# Altium PCB TIDA-010967_PCB.PcbDoc (part 3 of 5)
Units mil, origin at the board's own origin, x right, y up, seen from the top; angles counter-clockwise.
Board outline 2322.7 x 960 mil, 2 copper layers (Top Layer, Bottom Layer), stack 44.731 mil thick; 178 components, 80 nets, 496 pads, 399 vias.
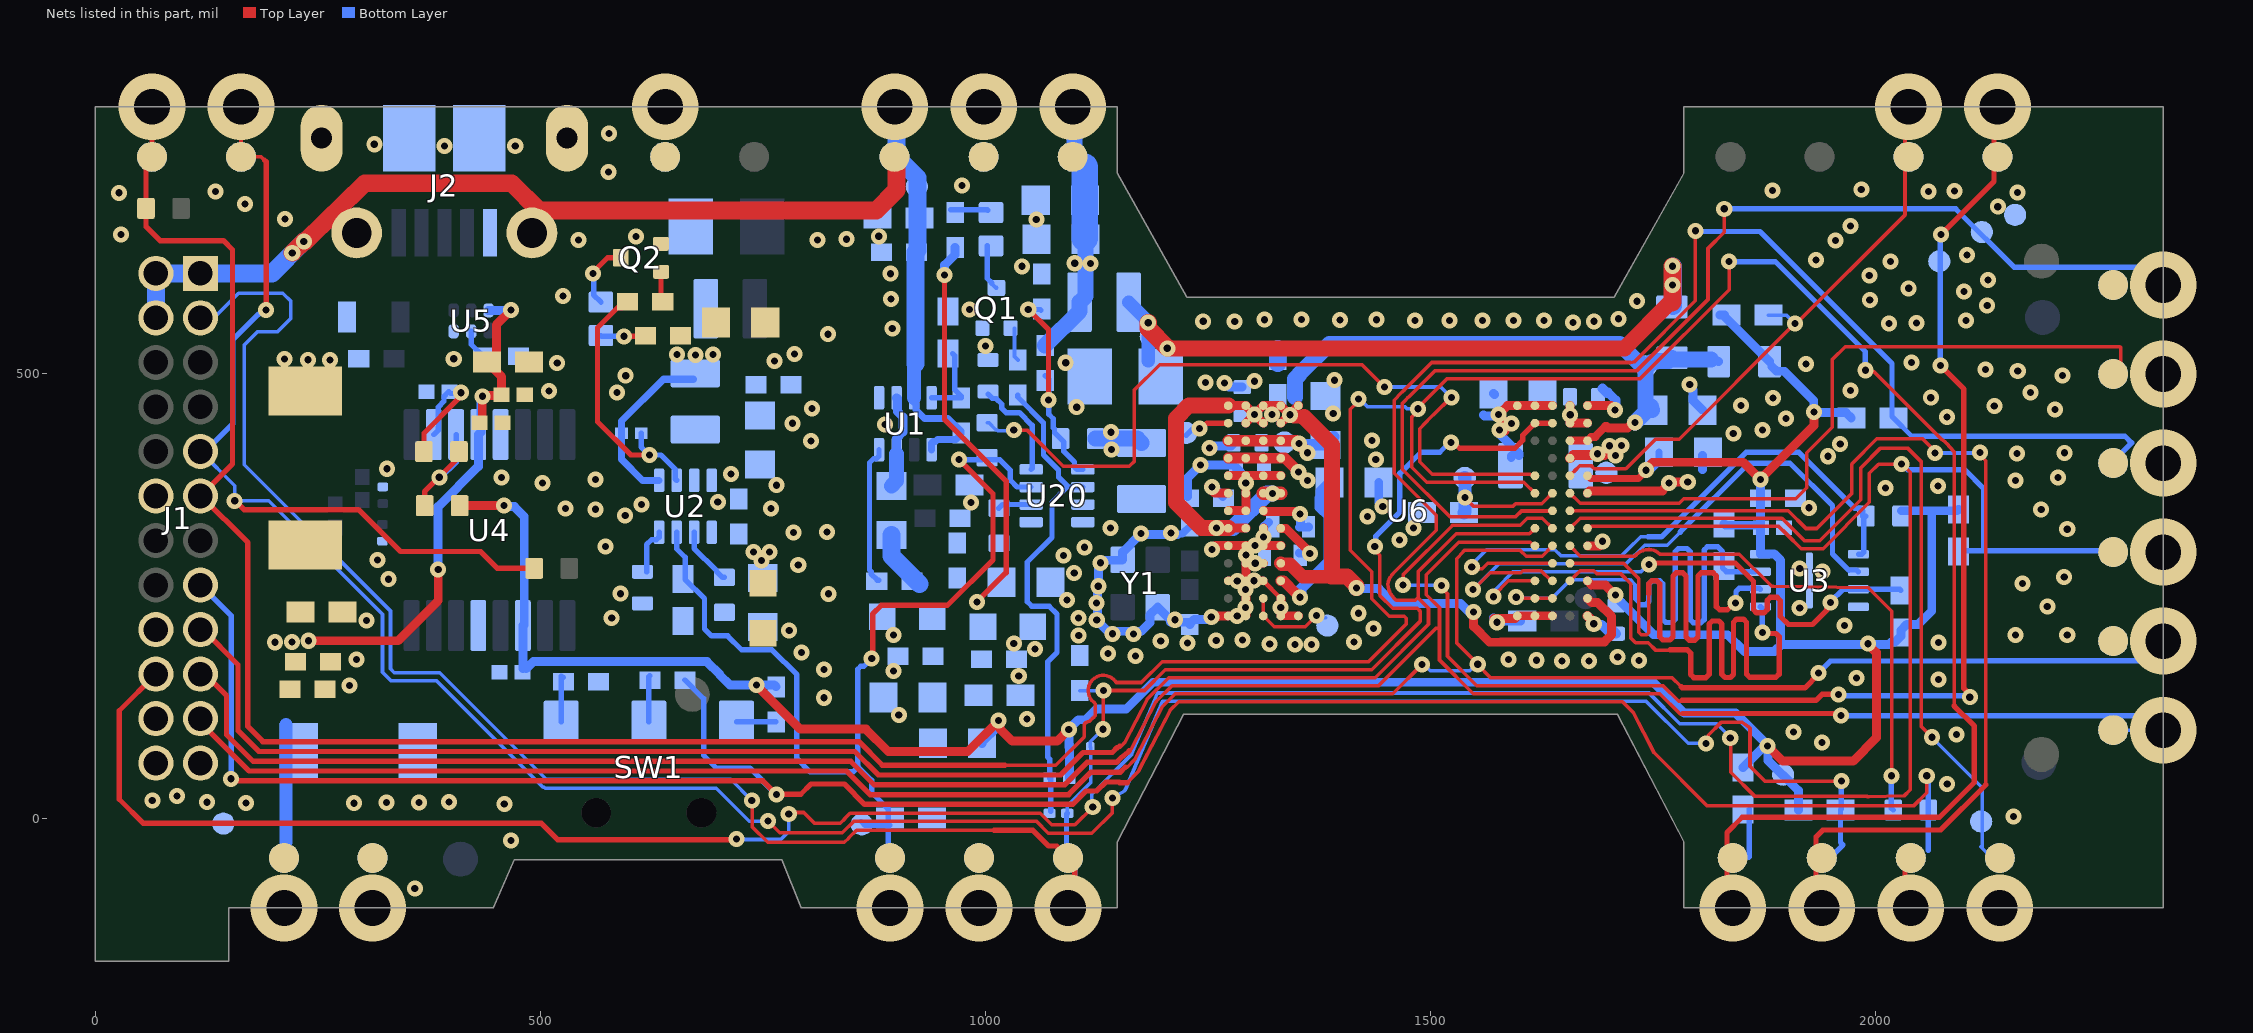
[diagram p2: the nets of this part, all layers, seen from the top]

## Part data (continued)
R14 R15: library part CMP-0027082-3, "RES, 27, 5%, 0.05 W, 0201", Manufacturer="Yageo America", Power_W=50mW, Supplier Part Number 1=YAG2291CT-ND, TempCo="200 ppm/C", Tolerance_%=5%, Value2=0.05W, Value_Code=27R0, ValueDisplayed=27, AEC Category=Q200, AEC Grade=N/A, AEC Qualified=N, ComponentLink1Description="Datasheet link", ComponentLink1URL=http://www.yageo.com/documents/recent/PYu-RC_Group_51_RoHS_L_5.pdf, CompType=Resistor, EIA_Code=E24, LatestRevisionDate=2017-03-09, MountType=SMT, PackageReference=0201, PartNumber=RC0201JR-0727RL, Published=2016-10-14, Publisher="Texas Instruments", Res_ohm=27, RoHS=Y, SizeArea_mm2=0.18, SizeX_mm=0.6, SizeY_mm=0.3, SizeZ_mm=0.26, Supplier 1=Digi-Key, Supplier 2=Mouser, Supplier Part Number 2=603-RC0201JR-0727RL, Technology="Thick Film", U/M=EA, Value1=5%, VDC_V=25V
R19: library part CMP-0026557-2, "RES, 7.87 k, 1%, 0.063 W, AEC-Q200 Grade 0, 0402", Manufacturer=Vishay-Dale, Power_W=63mW, Supplier Part Number 1=541-7.87KLCT-ND, TempCo="100 ppm/C", Tolerance_%=1%, Value2=0.063W, Value_Code=7k87, ValueDisplayed=7.87k, AEC Category=Q200, AEC Grade=0, AEC Qualified=Y, ComponentLink1Description="Datasheet link", ComponentLink1URL=http://www.vishay.com/docs/20035/dcrcwe3.pdf, CompType=Resistor, EIA_Code=E96, MountType=SMT, PackageReference=0402, PartNumber=CRCW04027K87FKED, Res_ohm=7.87k, RoHS=E, SizeArea_mm2=0.5, SizeX_mm=1, SizeY_mm=0.5, SizeZ_mm=0.6, Supplier 1=Digi-Key, Supplier 2=Newark, Supplier 3=Mouser, Supplier Part Number 2=52K7249, Supplier Part Number 3=71-CRCW0402-7.87K-E3, Technology="Thick Film", Value1=1%, VDC_V=50V
R21: library part CMP-0026574-2, "RES, 82.5 k, 1%, 0.063 W, AEC-Q200 Grade 0, 0402", Manufacturer=Vishay-Dale, Power_W=63mW, Supplier Part Number 1=541-82.5KLCT-ND, TempCo="100 ppm/C", Tolerance_%=1%, Value2=0.063W, Value_Code=82k5, ValueDisplayed=82.5k, AEC Category=Q200, AEC Grade=0, AEC Qualified=Y, ComponentLink1Description="Datasheet link", ComponentLink1URL=http://www.vishay.com/docs/20035/dcrcwe3.pdf, CompType=Resistor, EIA_Code=E96, MountType=SMT, PackageReference=0402, PartNumber=CRCW040282K5FKED, Res_ohm=82.5k, RoHS=E, SizeArea_mm2=0.5, SizeX_mm=1, SizeY_mm=0.5, SizeZ_mm=0.6, Supplier 1=Digi-Key, Supplier 2=Newark, Supplier 3=Mouser, Supplier Part Number 2=52K7304, Supplier Part Number 3=71-CRCW0402-82.5K-E3, Technology="Thick Film", Value1=1%, VDC_V=50V
R22: library part CMP-0120016-1, "33.2 Ohms ¡À1% 0.063W, 1/16W Chip Resistor 0402 (1005 Metric) Thin Film", Digikey Part Number=13-RT0402FRE0733R2LCT-ND, Manufacturer=Yageo, Mouser Part Number=603-RT0402FRE0733R2L, Operating Temperature Range="-55¡ãC to +155¡ãC", Power_W=63mW, TempCo=50ppm/¡ãC, Tolerance_%=1%, AEC Qualified=No, ComponentLink1Description=Datasheet, ComponentLink1URL=https://www.yageo.com/upload/media/product/productsearch/datasheet/rchip/PYu-RT_1-to-0.01_RoHS_L_15.pdf, datasheet=https://www.yageo.com/upload/media/product/productsearch/datasheet/rchip/PYu-RT_1-to-0.01_RoHS_L_15.pdf, Datasheet Path=datasheets/Res-RT0402FRE0733R2L.pdf, Digikey Description="RES SMD 33.2 OHM 1% 1/16W 0402", helpURL=https://upverter.com/upn/revision/fe73ddde98d0207b/, Lead Free=Yes, PackageReference=0402, Part Number=RT0402FRE0733R2L, PartNumber=RT0402FRE0733R2L, Res_ohm=33.2, RoHS=TRUE, Series=RT, SizeZ_mm=0.35mm, Supplier 1=Digikey, Supplier 2=Mouser, Supplier Part Number 1=13-RT0402FRE0733R2LCT-ND, Supplier Part Number 2=603-RT0402FRE0733R2L, Technology="Thin Film", VDC_V=50V
R23 R175: library part CMP-0027261-3, "RES, 100 k, 1%, 0.05 W, 0201", Manufacturer=Vishay-Dale, Power_W=50mW, Supplier Part Number 1=541-100KAABCT-ND, TempCo="100 ppm/C", Tolerance_%=1%, Value2=0.05W, Value_Code=100k, AEC Category=Q200, AEC Grade=N/A, AEC Qualified=N, ComponentLink1Description="Datasheet link", ComponentLink1URL=http://www.vishay.com/docs/20052/crcw0201e3.pdf, CompType=Resistor, EIA_Code=E96, MountType=SMT, PackageReference=0201, PartNumber=CRCW0201100KFKED, Res_ohm=100k, RoHS=E, SizeArea_mm2=0.18, SizeX_mm=0.6, SizeY_mm=0.3, SizeZ_mm=0.26, Supplier 1=Digi-Key, Supplier 2=Newark, Supplier 3=Mouser, Supplier Part Number 2=84R1457, Supplier Part Number 3=71-CRCW0201100KFKED, Technology="Thick Film", Value1=1%, ValueDisplayed=100k, VDC_V=30V
R26 R244: library part CMP-0026727-1, "RES, 1.00 M, 1%, 0.063 W, 0402", Manufacturer="Yageo America", Power_W=63mW, Supplier Part Number 1=311-1.00MLRCT-ND, TempCo="100 ppm/C", Tolerance_%=1%, Value2=0.063W, Value_Code=1M00, ValueDisplayed=1.00M, AEC Category=Q200, AEC Qualified=?, ComponentLink1Description="Datasheet link", ComponentLink1URL=http://www.yageo.com/NewPortal/yageodocoutput?fileName=/pdf/R-Chip/PYu-RC_Group_51_RoHS_L_0.pdf, CompType=Resistor, EIA_Code=E96, LatestRevisionDate=2017-03-09, MountType=SMT, PackageReference=0402, PartNumber=RC0402FR-071ML, Published=2008-06-26, Publisher="Texas Instruments", Res_ohm=1M, RoHS=Y, SizeArea_mm2=0.5, SizeX_mm=1, SizeY_mm=0.5, SizeZ_mm=0.6, Supplier 1=Digi-Key, Supplier 2=Newark, Supplier 3=Mouser, Supplier Part Number 2=66R1086, Supplier Part Number 3=603-RC0402FR-071ML, Technology="Thick Film", U/M=EA, Value1=1%
R27 R180: library part CMP-0094741-1, "Res Thick Film 0402 18K Ohm 1% 1/16W ¡À100ppm/¡ãC Molded SMD Paper T/R", Digikey Part Number=541-4757-1-ND, Manufacturer=Vishay, Mouser Part Number=71-CRCW040218K0FKEDC, Operating Temperature Range="-55¡ãC to +155¡ãC", Power_W=63mW, TempCo=100ppm/¡ãC, Tolerance_%=1%, AEC Qualified=No, ComponentLink1Description=Datasheet, ComponentLink1URL=https://www.vishay.com/docs/28773/crcwce3.pdf, datasheet=https://www.vishay.com/docs/28773/crcwce3.pdf, Datasheet Path=datasheets/Res-CRCW040218K0FKEDC.pdf, Digikey Description="RES 18K OHM 1% 1/16W 0402", helpURL=https://upverter.com/upn/revision/f5433614e467177c/, Lead Free=Yes, Mouser Description="Res Thick Film 0402 18K Ohm 1% 1/16W ¡À100ppm/¡ãC Molded SMD Paper T/R", PackageReference=0402, Part Number=CRCW040218K0FKEDC, PartNumber=CRCW040218K0FKEDC, Res_ohm=18k, RoHS=TRUE, Series="CRCW-C e3", SizeZ_mm=0.35mm, Supplier 1=Digikey, Supplier 2=Mouser, Supplier Part Number 1=541-4757-1-ND, Supplier Part Number 2=71-CRCW040218K0FKEDC, Technology="Thick Film", VDC_V=50V
R28 R29 R172 R179: library part CMP-0026704-1, "RES, 510, 1%, 0.1 W, 0402", Manufacturer=Panasonic, Power_W=100mW, Supplier Part Number 1=P510LCT-ND, TempCo="100 ppm/C", Tolerance_%=1%, Value2=0.1W, Value_Code=510R, ValueDisplayed=510, AEC Category=Q200, AEC Qualified=?, ComponentLink1Description="Datasheet link", ComponentLink1URL=http://industrial.panasonic.com/www-data/pdf/AOA0000/AOA0000CE2.pdf, CompType=Resistor, LatestRevisionDate=2017-03-09, MountType=SMT, PackageReference=0402, PartNumber=ERJ-2RKF5100X, Published=2008-06-26, Publisher="Texas Instruments", Res_ohm=510, RoHS=Y, SizeArea_mm2=0.5, SizeX_mm=1, SizeY_mm=0.5, SizeZ_mm=0.6, Supplier 1=Digi-Key, Supplier 2=Newark, Supplier 3=Mouser, Supplier Part Number 2=53W4394, Supplier Part Number 3=667-ERJ-2RKF5100X, Technology="Thick Film", U/M=EA, Value1=1%, VDC_V=50V
R50: library part CMP-0095013-1, "Res Thick Film 0402 47.5K Ohm 1% 1/16W ¡À100ppm/¡ãC Molded SMD Paper T/R", Digikey Part Number=13-AC0402FR-0747K5LCT-ND, Manufacturer=Yageo, Mouser Part Number=603-AC0402FR-0747K5L, Operating Temperature Range="-55¡ãC to +155¡ãC", Power_W=62.5mW, TempCo=100ppm/¡ãC, Tolerance_%=1%, AEC Grade="Grade 0", AEC Qualified=Yes, ComponentLink1Description=Datasheet, ComponentLink1URL=https://www.yageo.com/upload/media/product/productsearch/datasheet/rchip/PYu-AC_51_RoHS_L_8.pdf, datasheet=https://www.yageo.com/upload/media/product/productsearch/datasheet/rchip/PYu-AC_51_RoHS_L_8.pdf, Datasheet Path=datasheets/Res-AC0402FR-0747K5L.pdf, Digikey Description="RES SMD 47.5K OHM 1% 1/16W 0402", helpURL=https://upverter.com/upn/revision/53eb058114c18d9e/, Lead Free=Yes, Mouser Description="Thick Film Resistors - SMD 1/16W 47.5K ohm 1% AEC-Q200", PackageReference=0402, Part Number=AC0402FR-0747K5L, PartNumber=AC0402FR-0747K5L, Res_ohm=47.5k, RoHS=TRUE, Series=AC, SizeZ_mm=0.37mm, Supplier 1=Digikey, Supplier 2=Mouser, Supplier Part Number 1=13-AC0402FR-0747K5LCT-ND, Supplier Part Number 2=603-AC0402FR-0747K5L, Technology="Thick Film", VDC_V=50V
R165: library part CMP-0095015-1, "Res Thick Film 0201 10K Ohm 0.5% 0.05W ¡À50ppm/¡ãC Molded SMD Pressed Carrier T/R", Digikey Part Number=P15980CT-ND, Manufacturer=Panasonic, Mouser Part Number=667-ERJ-1RHD1002C, Operating Temperature Range="-55¡ãC to +125¡ãC", Power_W=50mW, TempCo=50ppm/¡ãC, Tolerance_%=0.5%, AEC Qualified=No, ComponentLink1Description=Datasheet, ComponentLink1URL=https://industrial.panasonic.com/cdbs/www-data/pdf/RDA0000/AOA0000C304.pdf, datasheet=https://industrial.panasonic.com/cdbs/www-data/pdf/RDA0000/AOA0000C304.pdf, Datasheet Path=datasheets/Res-ERJ-1RHD1002C.pdf, Digikey Description="RES SMD 10K OHM 0.5% 1/20W 0201", helpURL=https://upverter.com/upn/revision/1ca8f4053101326f/, Lead Free=Yes, Mouser Description="Current Sense Resistors 0201 10Kohms 0.5% Tolerance", PackageReference=0201, Part Number=ERJ-1RHD1002C, PartNumber=ERJ-1RHD1002C, Res_ohm=10k, RoHS=TRUE, Series=ERJ, SizeZ_mm=0.26mm, Supplier 1=Digikey, Supplier 2=Mouser, Supplier Part Number 1=P15980CT-ND, Supplier Part Number 2=667-ERJ-1RHD1002C, Technology="Thick Film", VDC_V=15V
R176: library part CMP-0086442-2, "RES SMD 0 OHM JUMPER 1/20W 0201", Manufacturer=Yageo, Power_W=50mW, TempCo=200ppm/¡ãC, Tolerance_%=5%, AEC Qualified=No, ComponentLink1Description=Datasheet, ComponentLink1URL=http://www.yageo.com/documents/recent/PYu-RC_Group_51_RoHS_L_10.pdf, PackageReference="0201 (0603 Metric)", PartNumber=RC0201JR-070RL, Res_ohm=0, RoHS=TRUE, SizeZ_mm=0.26mm, Technology="Thick Film", VDC_V=25V
SW1: library part CMP-0096333-1, "Slide Switch SPDT Surface Mount, Right Angle", Coil Resistance_ohm=80m¦¸, Contact Current Rating=100mA, Digikey Part Number=401-2012-1-ND, Manufacturer="C&K Switches", Mouser Part Number=611-AYZ0102AGRLC, Operating Temperature Range="-10¡ãC to +60¡ãC", AEC Qualified=No, Circuit=SPDT, ComponentLink1Description=Datasheet, ComponentLink1URL=https://www.ckswitches.com/media/1431/ayz.pdf, datasheet=https://www.ckswitches.com/media/1431/ayz.pdf, Datasheet Path=datasheets/Switch-AYZ0102AGRLC.pdf, Digikey Description="SWITCH SLIDE SPDT 100MA 12V", Electromechanical Life=10000Cycles, helpURL=https://upverter.com/upn/revision/0b48ea421d8a1f89/, Lead Free=Yes, MountType="Surface Mount", Mouser Description="Slide Switches SPDT SMT 1.2A SUBMIN", PackageReference=SMT_SW_7MM2_5MM3, Part Number=AYZ0102AGRLC, PartNumber=AYZ0102AGRLC, RoHS=TRUE, SizeZ_mm=1.5mm, Supplier 1=Digikey, Supplier 2=Mouser, Supplier Part Number 1=401-2012-1-ND, Supplier Part Number 2=611-AYZ0102AGRLC, VDC_V=12V
TP2 TP4 TP6 TP7 TP8 TP9 TP10 TP11 TP12 TP13 TP14 TP15 TP16 TP17 TP18 TP19: library part CMP-0078143-4, "TEST POINT.  No entry in BOM.", Manufacturer=N/A, CompType=Testpoint, PackageReference=N/A, PartNumber=N/A
U1: library part CMP-0088593-2, "1.6 V to 5 V, 2.5-A Low IQ Power Mux With Manual and Automatic Switchover", Manufacturer="Texas Instruments", Max Supply Voltage=5.5V, Min Supply Voltage=1.6V, Nominal Supply Current=0.5-1uA, Operating Temperature Range=to, Output Voltage=0-5.5V, AEC Category=Q200, AEC Qualified=No, ComponentLink1Description="Datasheet Link", ComponentLink1URL=http://www.ti.com/lit/ds/symlink/GPN.pdf, ComponentLink2Description="Product Folder", ComponentLink2URL=http://www.ti.com/product/GPN, ComponentLink3Description="Online Datasheet", ComponentLink3URL=http://www.ti.com/product/GPN/datasheet, CompType=IC, Datasheet Path=datasheets/IC-TPS2116DRLR.pdf, helpURL=https://upverter.com/upn/revision/79e2fa60ca8e3747/, Lead Free=Unknown, Number Of Outputs=1, PackageReference=FCSOT8, Part Number=TPS2116DRLR, PartNumber=TPS2116DRLR, RoHS=UNKNOWN, SizeZ_mm=0.6mm, Standoff Height=0mm, TaMax_C=+125¡ãC, TaMin_C=-55¡ãC
U2: library part CMP-0092337-2, "2.7-V to 6-V, 2-A Automotive Step-Down Converter in SOT583 Package", Manufacturer="Texas Instruments", Max Supply Voltage=6V, Min Supply Voltage=2.7V, Nominal Supply Current=17uA, Operating Temperature Range="-40¡ãC to +150¡ãC", Output Voltage=0.6-5.5V, Switching Frequency=1.8-4MHz, AEC Category=Q200, AEC Grade="Grade 1", AEC Qualified=Yes, ComponentLink1Description="Datasheet Link", ComponentLink1URL=http://www.ti.com/lit/ds/symlink/GPN.pdf, ComponentLink2Description="Product Folder", ComponentLink2URL=http://www.ti.com/product/GPN, ComponentLink3Description="Online Datasheet", ComponentLink3URL=http://www.ti.com/product/GPN/datasheet, CompType=IC, Datasheet Path=datasheets/IC-TPS6285021HQDRLRQ1.pdf, helpURL=https://upverter.com/upn/revision/d90298be1e254427/, Max Duty Cycle=100%, Number Of Outputs=1, Output Type=AdjustableProgrammable, PackageReference=SOT583, Part Number=TPS6285021HQDRLRQ1, PartNumber=TPS6285021HQDRLRQ1, RoHS=UNKNOWN, SizeZ_mm=0.6mm, Standoff Height=0mm, Switching Topology=Buck, TaMax_C=+125¡ãC, TaMin_C=-40¡ãC, TJmax_C=+150¡ãC
U3: library part CMP-0078466-1, "ULTRA LOW POWER, 16M-BIT [x 1/x 2/x 4] CMOS MXSMIO (SERIAL MULTI I/O) FLASH MEMORY, SON-8", Manufacturer="Macronix International Co., LTD", Supplier Part Number 1=1092-1178-1-ND, ComponentLink1Description="Datasheet URL", ComponentLink1URL=http://www.macronix.com/Lists/Datasheet/Attachments/6257/MX25R1635F,%20Wide%20Range,%2016Mb,%20v1.5.pdf, MountType=SMT, PackageReference=SON-8, PartNumber=MX25R1635FZUIH0, RoHS=Y, SizeArea_mm2=6, SizeAreaWB_mm2=12, SizeX_mm=3, SizeY_mm=2, SizeZ_mm=0.6, Supplier 1=Digi-Key
U4: library part CMP-0065473-1, "USB to UART, SSOP-16", Manufacturer=FTDI, Supplier Part Number 1=768-1135-1-ND, ComponentLink1Description="Datasheet URL", ComponentLink1URL=http://www.ftdichip.com/Support/Documents/DataSheets/ICs/DS_FT230X.pdf, LatestRevisionDate=2017-06-05, MountType=SMT, PackageReference=SSOP-16, PartNumber=FT230XS-R, Publisher="Texas Instruments", RoHS=Y, SizeArea_mm2=29.351, SizeAreaWB_mm2=55.131, SizeX_mm=5.99, SizeY_mm=4.9, SizeZ_mm=1.75, Supplier 1=Digi-Key, Supplier 2=Mouser, Supplier Part Number 2=895-FT230XS-R
U5: library part CMP-0043115-3, "4-Channel ESD Protection Array for High-Speed Data Interfaces, DRY0006A (USON-6)", Breakdown Voltage(Min)(V)=6, IO Capacitance(Typ)(pF)=1.6, IO Leakage Current(nA)=1, Manufacturer="Texas Instruments", Operating Temperature Range="-40 to 85 C", Rating=Catalog, 1394 / Firewire=TRUE, AEC Category=Q200, AEC Qualified=N, ComponentLink1Description="Datasheet Link", ComponentLink1URL=http://www.ti.com/lit/ds/symlink/tpd4e004.pdf, ComponentLink2Description="Product Folder", ComponentLink2URL=http://www.ti.com/product/tpd4e004, ComponentLink3Description="Online Datasheet", ComponentLink3URL=http://www.ti.com/product/tpd4e004/datasheet, CompType=IC, Eco-Plan="Green (RoHS & no Sb/Br)", IEC 61000-4-2 Air-Gap(+/- kV)=12, IEC 61000-4-2 Contact(+/- kV)=8, MountType=SMT, PackageDescription=USON-6, PackageReference=DRY0006A, PartNumber=TPD4E004DRYR, RoHS=Y, Serial ATA / eSATA=TRUE, SizeArea_mm2=1.45, SizeAreaWB_mm2=4.9, SizeX_mm=1.0, SizeY_mm=1.45, SizeZ_mm=0.6, USB High Speed=TRUE
U6: library part CMP-0120794-2, Manufacturer="Texas Instruments", Operating Temperature Range=to, AEC Category=Q200, ComponentLink1Description="Datasheet Link", ComponentLink1URL=http://www.ti.com/lit/ds/symlink/GPN.pdf, ComponentLink2Description="Product Folder", ComponentLink2URL=http://www.ti.com/product/GPN, ComponentLink3Description="Online Datasheet", ComponentLink3URL=http://www.ti.com/product/GPN/datasheet, CompType=IC, Datasheet Path=datasheets/IC-XI6432BRQAAMY.pdf, helpURL=https://upverter.com/upn/revision/bd36f950fb90ba88/, PackageReference=FCCSP101, Part Number=XI6432BRQAAMY, PartId=1, PartNumber=XI6432BRQAAMY, RoHS=UNKNOWN, SizeZ_mm=0.757mm, Standoff Height=0.219mm
U20: library part CMP-0120069-1, "2.7-V to 6-V, 2-A Step-Down Converter in SOT583 Package", Manufacturer="Texas Instruments", Max Supply Voltage=6V, Min Supply Voltage=2.7V, Nominal Supply Current=17uA, Operating Temperature Range="-40¡ãC to +150¡ãC", Output Voltage=0.6-5.5V, Switching Frequency=1.8-4MHz, AEC Qualified=No, Datasheet Path=datasheets/IC-TPS6285020MDRLR.pdf, helpURL=https://upverter.com/upn/revision/61877cd23c411ac8/, Max Duty Cycle=100%, Number Of Outputs=1, Output Type=AdjustableProgrammable, PackageReference=SOT583, Part Number=TPS6285020MDRLR, PartNumber=TPS6285020MDRLR, RoHS=UNKNOWN, SizeZ_mm=0.6mm, Standoff Height=0mm, Switching Topology=Buck, TJmax_C=+150¡ãC
Y1: library part CMP-0120019-1, "Crystal Resonator 40MHz ¡À10ppm (Tol) ¡À20ppm (Stability) 8pF 50Ohm 4-Pin SMD T/R", Frequency Stability=20ppm, Frequency Tolerance=10ppm, Frequency_Fixed=40MHz, Load Capacitance=8pF, Manufacturer=Murata, Operating Temperature Range="-40¡ãC to +105¡ãC", AEC Qualified=No, ComponentLink1Description=Datasheet, ComponentLink1URL=https://www.murata.com/en-global/products/productdetail?partno=XRCGB40M000F1S2GR0, datasheet=https://www.murata.com/en-global/products/productdetail?partno=XRCGB40M000F1S2GR0, Datasheet Path=datasheets/Crys-XRCGB40M000F1S2GR0.pdf, ESR=50, helpURL=https://upverter.com/upn/revision/c49e01f65015ed60/, Lead Free=Yes, PackageReference=SMT_CRYSTAL_2MM0_1MM6, Part Number=XRCGB40M000F1S2GR0, PartNumber=XRCGB40M000F1S2GR0, RoHS=TRUE, Series=XRCGB, SizeZ_mm=0.7mm, Tolerance_%=10ppm
ZZ1: library part CMP-0003616-3, ClassName=AssemblyNote, CompType=AssemblyNote, Key=AssemblyNoteLabel, LatestRevisionDate=2017-03-09, Publisher="Texas Instruments"
ZZ2: library part CMP-0077236-1, ClassName=AssemblyNote, CompType=AssemblyNote, Key=AssemblyNote, LatestRevisionDate=2017-08-10, Publisher="Texas Instruments"
ZZ3: library part CMP-0077237-1, ClassName=AssemblyNote, CompType=AssemblyNote, Key=AssemblyNote, LatestRevisionDate=2017-08-10, Publisher="Texas Instruments"
ZZ4 ZZ5: library part CMP-0077238-1, ClassName=AssemblyNote, CompType=AssemblyNote, Key=AssemblyNote, LatestRevisionDate=2017-08-10, Publisher="Texas Instruments"

## Via types
v1: diameter 18, hole 8, Top Layer to Bottom Layer, tented both sides, 370 vias
v2: diameter 75, hole 40, Top Layer to Bottom Layer, 26 vias
v3: diameter 118.11, hole 118.11, Top Layer to Bottom Layer, tented both sides, 3 vias

## Nets (pads, with @x,y where several pads share a name; then routed paths per layer and width w, separated by ;. In a path a pad name is that pad's centre, name@x,y a point inside that pad or via, vN(x,y) a via of type N, cw(c..) or ccw(c..) an arc to the next point about the centre after c; other vN are vias at no path point)
5V_IN_USB: C25.1 C28.1 C29.2 C30.1 C32.2 C33.1 C36.1 C37.1 C38.1 C45.1 D1.1 J29.1 R5.2 U2.1 U4.12 U5.6 | length 769.7
  Top Layer w10: v1(239.57,200.14) 340.07,200.14 385.22,245.29 v1@385.22,279.99 ; C38.1@431.45,444.93 434.56,448.04 v1@434.56,474.59 ; v1(434.7,474.73) 435.54,475.57 455.58,475.57 C37.1@456.41,476.41 456.41,496.53 C36.1@439.77,513.17 443.71,513.17 450.52,519.98 450.52,555.1 v1(467.07,571.65)
  Bottom Layer w10: v1@384.98,280.22 384.98,350.79 430.24,396.05 U4.12@430.24,431.73 433.18,434.66 433.18,474.29 v1@433.59,474.7 ; U5.6@441.8,571.28 466.7,571.28 v1(467.07,571.65)
  Bottom Layer w15: 214.09,-26.26 214.09,105.87 C33.1@214.09,76.51
  other v1: 201.89,198.46 221.07,198.63 385.13,280.08 748.2,290.16 739.09,300.01 757.16,300.01
  other v2: 212.04,-100
DC_OUT_3V3: C19.1 C49.1 C50.1 L2.2 L3.1 R23.1 R28.1 U2.5 | length 195.3
  Bottom Layer w8: U2.5@633.26,380.3 614.74,380.3 591.06,403.99 591.06,446.91 638.05,493.9 L2.2@671.99,493.9
  other v1: 674.34,521.2 653.5,521.63 693.89,521.63
GND: C1.2 C3.2 C4.2 C5.1 C6.2 C7.2 C8.1 C9.1 C10.2 C11.2 C13.2 C14.1 C15.2 C16.2 C17.1 C18.2 C19.2 C20.1 C21.2 C22.2 C23.2 C25.2 C26.2 C27.1 C28.2 C29.1 C30.2 C31.1 C32.1 C33.2 C34.1 C35.2 C36.2 C37.2 C38.2 C39.2 C40.2 C41.1 C42.1 C43.2 C44.2 C45.2 C46.1 C47.1 C48.1 C49.2 C50.2 C56.2 C60.2 C69.2 C72.2 C73.2 C74.2 C128.2 C129.2 J1.12 J1.18 J1.22 J1.23 J1.24 J2.5 J2.6 J2.7 J2.8 J2.9 J2.10 J2.11 J21.1 J25.1 J28.1 J32.1 Q1.2 Q2.2 R2.1 R10.1 R16.1 R21.1 R25.2 R26.2 R27.2 R180.2 R244.2 TP11.1 TP15.1 U1.1 U2.8 U3.4 U3.9 U4.5 U4.13 U5.3 U6.A1 U6.A3 U6.A4 U6.A5 U6.A6 U6.A7 U6.A9 U6.A10 U6.B7 U6.B9 U6.C8 U6.C9 U6.C10 U6.D8 U6.D9 U6.E1 U6.E7 U6.E8 U6.E9 U6.E10 U6.F8 U6.G9 U6.G10 U6.H1 U6.H9 U6.J7 U6.J8 U6.J9 U6.J10 U6.N1 U6.N3 U6.N4 U6.N5 U20.8 Y1.2 Y1.4 | length 1542.4
  Top Layer w5: U6.C8@1311.9,267.38 U6.B7@1331.58,247.7
  Top Layer w10: v1@1253.42,222.94 1253.42,223.77 1256.59,226.95 1260.08,226.95 1261.12,227.98 U6.A10@1272.39,227.98 ; v1(1254.44,302.6) 1258.76,306.92 U6.E9@1292.21,306.92 ; U6.A10@1272.59,228.18 1292.28,228.18 U6.C9@1292.28,267.55 ; U6.C10@1272.59,267.55 U6.C9@1292.28,267.55 ; U6.G10@1272.59,346.29 1292.28,346.29 1292.28,365.98 1292.22,366.03 v1(1292.22,377.16) ; U6.J10@1272.59,385.66 U6.J9@1292.21,385.66 ; U6.E9@1292.21,306.75 1292.49,307.02 v1(1302.62,307.02) ; U6.E9@1292.21,306.75 U6.D9@1292.28,287.24 ; U6.J9@1292.28,385.66 U6.J7@1331.65,385.66 ; U6.C8@1311.9,267.55 U6.C9@1292.28,267.55 ; U6.D8@1311.96,287.24 U6.D9@1292.28,287.24 ; U6.E8@1311.96,306.92 U6.E7@1331.65,306.92 ; U6.E8@1311.96,307.02 v1(1311.96,316.81) U6.F8@1311.96,326.61 ; U6.B7@1331.65,247.7 1331.65,228.18 U6.A6@1351.33,228.18 ; v1@1571.22,224.97 1594.51,224.97 U6.A5@1595.58,226.03 ; v1@1583.42,435.71 1583.42,446.74 v1(1576.05,454.1) 1586.18,464.23 U6.N5@1597.33,464.23 ; U6.A5@1597.4,228.18 U6.A3@1636.77,228.18 ; U6.N5@1597.4,464.4 U6.N3@1636.77,464.4 ; U6.N1@1676.07,464.23 1702.73,464.23 v1@1707.99,458.97 ; U6.H1@1676.14,365.98 1678.35,368.19 1760.37,368.19 1760.37,369.75 v1(1767.77,377.15) 1768.92,378.31 v1(1788.67,378.31) ; U6.E1@1676.37,306.68 1689.35,306.68 v1@1692.59,309.92 ; U6.C9@1292.28,267.55 U6.D9@1292.28,287.24
  Top Layer w11: U6.A1@1676.07,228.01 1684.35,219.73 v1@1684.35,217.5
  Bottom Layer w8: 1217.08,320.24 1220.83,320.24 C46.1@1229.42,328.84 ; v1(1254.44,302.6) v1@1254.44,304.89
  Bottom Layer w10: v1@1215.37,319.3 1173.99,319.3 1173.76,319.53 1153.95,299.71 Y1.2@1153.95,291.08 1153.39,290.52 1132.53,290.52 1126.67,284.66 1126.67,261.37 1125.69,260.39 1125.69,224.12 v1(1124.83,223.26) 1137.31,210.79 1174.9,210.79 1184.54,220.42 1184.54,229.15 Y1.4@1193.32,237.93 1208.7,222.54 1207.53,221.38 1207.53,220.96 C47.1@1229.56,220.96 ; C6.2@1226.57,362.2 1226.57,382.66 v1(1241.29,397.38) 1278.34,397.38 C9.1@1281.43,394.28 1292.22,383.49 v1(1292.22,377.16) ; C47.1@1229.56,218.22 1229.56,219.26 1234.41,224.1 1251.58,224.1 v1@1252.89,225.41 ; v1@1250.71,417.52 1252.16,418.98 1275.71,418.98 1278.58,421.85 C20.1@1278.58,422.3 ; v1(1268.51,489.86) 1273.43,484.94 C14.1@1288.21,484.94 ; v1(1311.96,316.81) 1311.96,327.52 C22.2@1317.74,333.3 ; C13.2@1328.14,516.13 C13.2@1328.14,516.13 ; 1328.14,532.03 1328.3,532.19 ; C23.2@1441.56,377.89 1441.56,355.42 v1(1446.07,350.91) ; 1559.42,453.79 1560.56,452.65 v1@1575.53,452.65 ; v1@1570.52,225.96 1574.46,222.02 C43.2@1601.03,222.02 ; C26.2@1570.65,477.81 C26.2@1571.65,476.81 ; v1@1574.56,435.02 1599.19,410.39 C27.1@1599.19,408.28 ; C27.1@1590.42,406.19 C27.1@1590.42,407.85 ; 1699.02,479.49 1707.99,470.52 v1@1707.99,458.97 ; v1(1790.89,488.04) 1790.89,485.88 1794.68,482.09 1794.68,469.87 C15.2@1805.42,459.12 ; 1805.01,392.38 1805.19,392.38 C21.2@1805.19,408.39
  Bottom Layer w11: 1692.17,217.84 1699.62,210.38 1705.88,210.38 C17.1@1708.25,208.01 ; C5.1@1692.83,483.52 1697.94,478.41
  Bottom Layer w20: C13.2@1328.06,512.06 1328.06,527.96
  other v1: 358.85,-78.02 466.78,-24.35 2154.77,2.83 459.39,16.83 169.13,18.06 290.6,17.68 125.64,18.79 326.88,18.43 363.52,18.55 397.2,19 63.97,20.57 91.72,25.93 2080.13,39.32 1939.53,86.06 2090.68,94.94 1907.55,97.84 1046.59,112.44 902.46,116.63 818.57,136.12 285.64,149.97 2070.54,156.61 1978.4,158.48 1037.22,160.35 896.6,166.09 818.36,167.83 1618.85,178.25 1647.3,177.54 1677.64,177.44 1733.91,178.07 293.5,179.17 1587.39,178.95 1710.01,181.87 1168.32,183.09 1137.68,185.83 793.1,186.76 1055.55,190.76 1347.39,195.73 1365.88,196.06 1031.67,196.85 1319.14,196.36 1226.59,197.47 2070.4,198.03 1413.91,198.58 1196.72,200.05 1259.04,200.42 1288.53,201.16 1104.59,206 896.73,206.7 2156.91,206.45 2214.94,206.45 1142.37,207.95 1166.11,207.8 779.38,211.79 1435.66,214.06 1964.84,217.41 1683.09,219.18 1574.33,220.86 304.39,222.71 1212.71,223.73 580.01,225.72 1104.28,225.74 1253.47,226.77 1282.6,228.09 1418.88,231.02 1914.45,237.11 1292.14,237.62 1331.48,237.48 2192.51,238.64 1124.76,242.65 1091.44,245.75 590,252.96 823.59,252.88 1292.01,257.91 1126.55,261.37 2164.71,264.48 1282.73,267.07 1301.67,267.56 329.23,269.27 2211.53,271.8 1099.52,276.43 1940.03,277.95 1914.45,281.33 789.56,285.2 1302.85,287.2 1129.05,287.71 316.85,290.78 1087.63,295.96 1292.62,296.65 1110.92,305.14 573.2,305.85 1693.09,311.86 1464.96,313.13 1174.62,320.74 1208.07,321.16 784.26,321.93 821.71,322.19 2214.94,325.44 1140.13,326.59 1480.66,326.69 1428.75,339.53 595.2,340.83 561.65,347.8 2185.68,347.38 528.02,348.74 758.99,348.76 1924.86,349.5 613.44,353.16 983.72,355.31 699.17,356.2 2010.7,371.52 2069.68,374.14 765.02,374.85 502.46,377.34 2156.91,380.06 561.68,381.34 456.05,383.44 2204.7,383.47 713.93,387.29 327.83,393.35 1438.25,403.8 1946.4,407.39 2158.37,410.29 2212.01,411.27 1251.35,416.72 1959.92,421.23 803.67,424.6 1433.88,425.24 1839.81,432.97 1577.32,437.05 1872.83,436.84 887.22,443.12 1590.61,443.99 782.97,444.39 1899.01,449.93 2079.86,451.45 1390.44,455.46 1707.13,459.29 2201.28,460.03 804.99,461.22 1102.36,462.44 1848.44,464.2 2133.01,463.93 1884.43,472.83 2061.66,473.14 586.06,479.02 2173.49,479.05 509.56,480.52 1971.42,481.34 1246.87,490.39 1302.14,491.67 1391.81,492.81 595.76,497.83 2209.57,498.07 2159.35,502.94 2123.26,504.89 1921.41,511.18 518.8,512.24 1090,512.41 2039.95,512.88 762.92,514.26 402.59,516.85 785.29,522.18 999.93,531.35 822.76,544.44 895.18,550.73 2014.87,556.57 2045.59,556.86 1659.96,557.6 1244.41,558.99 1279.82,558.64 1683.57,558.99 1482.21,559.68 1521.1,560.03 1558.24,560.03 1592.96,559.68 1627.33,559.68 2101.12,559.67 1313.15,560.72 1354.81,561.07 1398.2,560.37 1439.17,560.72 1710.99,561.76 981.85,572.09 2125.04,576.59 1731.82,581.55 1993.16,583.07 893.91,583.82 525.15,587.4 2099.12,592.3 2036.85,596.04 2125.77,605.26 1992.58,610.42 893.34,612.43 1041,620.76 2016.43,626.11 1932.84,627.89 2102.25,633.24 810.99,650.1 1954.83,649.87 542.54,650.36 843.66,651.15 607.38,654.1 880.04,654.45 28.82,656.42 1971.46,665.94 213.23,673.95 1056.93,673.46 2136.95,687.66 167.98,690.68 26.45,703.31 2159.14,703.64 134.99,704.9 2059.12,704.84 1883.79,705.69 2088.44,705.4 1983.58,706.81 973.55,711.61 576.26,726.5 392.38,755.74 471.67,756 313.34,757.85 576.79,769.7
  other v2: 311.39,-100 992.59,-100 640.07,800 997.82,800
GPIO_2: J8.1 U6.H2 | length 797.5
  Top Layer w4: U6.H2@1656.45,365.98 1667.74,354.68 1779.23,354.68 1784.1,359.56 1909.89,359.56 1922.43,372.1 1922.43,411.32 1951.16,440.06 1951.16,516.09 1965.64,530.57 2274.14,530.57 2275.15,529.56 2275.15,508.31 J8.1@2266.57,499.73
  other v2: 2322.82,499.73
GPIO_4: R7.1 U6.J4 | length 875.1
  Top Layer w4: v1(1031.65,436.8) 1046.56,436.8 1087.34,396.03 1161.48,396.03 1167.19,401.73 1167.19,482 1195.44,510.25 1422.86,510.25 v1(1447.93,485.18) ; v1(1523.13,473.37) 1522.73,473.37 1503.19,453.82 1502.99,453.82 1491.04,441.88 1491.04,441.68 1487.65,438.29 1487.65,401.17 1501.52,387.3 1611.75,387.3 1612.44,386.61 1615.9,386.61 U6.J4@1617.02,385.49
  Bottom Layer w4: R7.1@1001.68,445.12 1003.85,445.12 1003.85,444.91 1011.49,437.27 1012.75,437.27 1013.83,436.19 1031.04,436.19 v1(1031.65,436.8) ; v1(1447.93,485.18) 1511.31,485.18 v1(1523.13,473.37)
HOST_INTR_GPIO_5: J4.1 R24.2 U6.J2 | length 649.2
  Top Layer w4: U6.J2@1659.69,388.91 1661.58,390.8 ; 1661.54,390.84 1667.31,396.61 1680.39,396.61 1680.59,396.41 1683.77,393.23 1719.27,393.23 1752.49,426.45 1779.01,426.45 1780.29,427.73 1904.49,551.93 1906.23,551.93 2032.7,678.4 v2@2032.7,800
  Bottom Layer w4: R24.2@1879.39,565.99 1899.29,565.99 v1@1907.71,557.57
  other v1: 1908.97,556.46
  other v2: 2036.65,800
NetC2_2: C2.2 R1.1 R2.2 U20.5 | length 252.5
  Top Layer w6: v1(1047.9,572.28) 1070.59,549.59 v1@1070.59,470.57
  Bottom Layer w6: v1(1047.9,572.28) 1061.31,572.28 R2.2@1062.25,571.35 ; C2.2@1066.97,497.78 1070.91,493.84 1070.91,454.64 1076.02,449.52 1076.02,439.45 1077.35,438.13 1077.35,433.97 1087.94,423.38 1087.94,412.82 1099.84,400.92 1099.84,395.42 1102.75,392.51 U20.5@1109.3,392.51
  other v1: 1070.68,470.45
NetC40_1: C40.1 R13.1 U4.10 | length 149.5
  Top Layer w6: R13.1@369.12,412.51 369.12,433.26 405.92,470.05 408.46,472.59 408.46,476.56 v1@409.78,477.88
  Bottom Layer w6: U4.10@380.24,431.73 385.27,436.75 385.27,462.77 391.73,469.23 391.73,474.62 C40.1@397,479.89 ; C40.1@398.77,478.52 399.4,477.88 v1@409.78,477.88 ; v1@409.78,477.79 v1@410.66,477.79
  other v1: 410.75,478.74
NetD1_2: D1.2 L1.2
  other v1: 238.73,515.72 263.58,515.43 212.68,516.46
NetD2_1: D2.1 Q2.3 | length 72.4
  Top Layer w6: v1(559.08,612.56) 559.08,614.06 575.34,630.31 Q2.3@590.14,630.31
  Bottom Layer w6: v1@559.68,610.18 559.68,588.69 D2.1@567.93,580.44
NetD2_2: D2.2 R28.2 | length 50.7
  Top Layer w6: v1(593.73,542.11) 617.05,542.11 R28.2@617.86,542.92
  Bottom Layer w6: D2.2@567.93,543.04 568.87,542.11 v1(593.73,542.11)
NetD3_1: D3.1 Q1.3 | length 52.2
  Bottom Layer w4.8: 1001.86,607 1001.97,607.1 ; Q1.3@1006.65,601.46 1011.61,596.5 Q1.3@1012.23,596.5
  Bottom Layer w6: 1001.86,607 Q1.3@1007.03,601.83 ; 1001.97,607.1 D3.1@1001.97,644.19
NetD3_2: D3.2 R172.2 | length 41.8
  Bottom Layer w6: R172.2@961.03,684.13 1001.99,684.13 D3.2@1002.59,683.53
NetL4_1: L4.1 U1.2 U1.7 | length 102.6
  Bottom Layer w10: U1.7@899.98,414.75 899.98,427.59 907.22,434.84 907.22,451.4 900.88,457.74 900.88,472.11 U1.2@899.98,473.02
  Bottom Layer w17: L4.1@894.26,374.11 899.94,379.8 U1.7@899.94,410.06
NetQ1_1: Q1.1 R179.1 | length 36.6
  Bottom Layer w4.5: Q1.1@1032.53,550.72 1032.53,519.2 R179.1@1036.12,515.61
NetQ2_1: Q2.1 R29.1 | length 33.5
  Top Layer w6: Q2.1@635.42,614.57 635.42,585.39 R29.1@638.48,582.33
NetR3_1: R3.1 U20.2 | length 37.8
  Bottom Layer w6: R3.1@1014.95,349.1 1019,353.14 U20.2@1051.03,353.14
NetR5_1: R5.1 U2.2 | length 65.9
  Bottom Layer w6: U2.2@672.63,322.04 672.63,303.94 697.69,278.89 697.69,278.16 704.53,271.32 R5.1@706.5,271.32
NetR12_2: R12.2 R13.2 U4.11 | length 128.1
  Top Layer w6: R12.2@369.94,351.84 369.94,367.78 406.72,404.56 R13.2@406.72,407.64
  Bottom Layer w6: v1(386.36,383.78) 388.5,383.78 405.24,400.52 U4.11@405.24,431.73
NetR16_2: R16.2 U5.2 | length 33.8
  Bottom Layer w6: U5.2@422.12,547.65 422.12,533.19 R16.2@435.78,519.53
NetR20_2: R20.2 SW1.2 | length 52.2
  Bottom Layer w6: SW1.2@621.72,109.24 621.72,159.85 R20.2@622.86,160.99
NetR22_2: R22.2 U6.E2 | length 620.7
  Top Layer w4: U6.E2@1656.39,306.75 1667.95,295.18 1681.73,295.18 1729.01,295.18 1730.84,297.01 ; 1730.03,295.96 cw(c1744.98,282.56) 1745.13,302.64 cw(c1745,285.64) 1757.22,297.45 1846.44,297.45 1880.22,264.21 1883.03,261.45 1884.63,261.43 1991.44,259.88 1992.59,258.73 2017.89,233.43 v1@2017.89,48.62
  Bottom Layer w6: v1@2017.4,48.13 2017.4,12.04 R22.2@2019.49,9.95
  other v1: 2017.75,48.48
NetR27_1: R27.1 U2.4 | length 53.8
  Bottom Layer w6: R27.1@619.5,277.35 619.32,277.52 619.32,308.1 624.86,313.63 630.36,313.63 633.26,316.54 U2.4@633.26,322.04
NetR180_1: R180.1 U20.4 | length 116.9
  Bottom Layer w6: R180.1@1002.72,477.08 1007.6,472.2 1011.84,472.2 1018.28,465.77 1018.28,461.12 1022.96,456.43 1027.62,456.43 1027.74,456.31 1038.12,456.31 1052.33,442.1 1052.33,393.81 U20.4@1051.03,392.51
NetTP10_1: TP10.1 U6.M10 | length 52.6
  Top Layer w6: v1@1239.31,438.03 1242.31,438.03 1248.83,444.55 U6.M10@1272.53,444.55
  Bottom Layer w6: TP10.1@1225.54,431.1 1232.47,438.03 v1@1239.31,438.03
  other v1: 1240.22,438.53
OUT_3V3: C1.1 C3.1 J1.1 J1.2 J1.4 J22.1 R9.2 TP6.1 U1.3 U1.5 | length 1456
  Top Layer w20: v1@221.31,635.88 v1(234.13,648.47) v1@235.08,648.47 ; v1@235.79,648.46 302.56,714.06 467.7,714.06 498.31,683.45 877.11,683.45 900,706.33 J22.1@900,743.75
  Bottom Layer w8: U1.3@920.35,467.32 921.83,465.84 921.83,459.22 931.23,449.83 957.46,449.83 965.83,441.46 966.61,441.46 972.45,435.61 972.45,432.09 966.61,426.24 945.94,426.24 943.63,423.94 941.25,423.94 939.35,422.03 U1.5@939.35,414.75
  Bottom Layer w10: 919.66,509.66 920.71,510.7
  Bottom Layer w15: 920.71,510.7 921.27,511.27 ; C1.1@922.31,636.34 C1.1@924.64,638.67
  Bottom Layer w16: U1.3@919.66,473.02 919.66,509.66
  Bottom Layer w20: J1.4@68.1,562.73 J1.2@68.1,612.73 198.38,612.73 v1(234.13,648.47) ; v2@900,800 900,743.75 923.6,720.15 923.6,675.03 C1.1@923.6,638.75 ; 921.27,511.27 C1.1@921.27,636.42
  other v1: 221.2,635.77
  other v2: 897.82,800
PMIC_CLKOUT_SOP1: R25.1 TP8.1 U6.H3 | length 146.6
  Top Layer w4: v1@1538.8,360.26 1548.01,351.05 1592.37,351.05 1595.27,353.95 ; 1595.5,353.96 1624.66,353.96 1629.15,358.44 ; 1629.16,358.43 U6.H3@1636.27,365.53
  Bottom Layer w15: R25.1@1537.38,344 1538.45,345.07 v1(1538.45,360.86) 1538.45,382.76 TP8.1@1538.18,383.04
QSPI_CS: R50.2 U3.1 U6.D3 | length 678.6
  Top Layer w4: v1@1545.3,281.26 1557.87,281.26 ; 1557.87,280.97 1563.96,287.07 U6.D3@1636.7,287.07 ; U6.D3@1636.65,287.12 U6.D3@1636.77,287.24
  Bottom Layer w4: v1@1541.51,281.26 1562.68,302.43 1639.44,302.43 1646.02,295.85 1714.55,295.85 1721.33,302.64 1735.73,317.03 1744.09,317.03
  Bottom Layer w6: 1744.22,316.9 1759.17,316.9 1854.05,411.78 1913.51,411.78 1976.45,348.85 1981.95,348.85 1985.13,345.66 R50.2@1985.13,340.16 ; U3.1@1980.4,297.32 1984.28,297.32 1986.2,299.24 1986.2,337.58 R50.2@1988.79,340.16
  other v1: 1546.08,282.92
QSPI_D0: U3.5 U6.C2 | length 675.1
  Top Layer w4: U6.C2@1656.39,267.38 1663.2,274.19 1667.9,278.88 1678.91,278.88 1683.12,278.91 1686.85,275.19 1695.44,275.19 1703.89,275.19 1713.68,275.19 1724.65,264.21 1724.65,203.24 1730.06,197.83 1744.35,197.83 1752.47,189.71 1768.57,189.71
  Top Layer w6: 1768.74,189.88 1788.46,189.88 1791.98,186.37 1791.98,162.23 1795.49,158.72 1809.18,158.72 1812.69,162.23 1812.69,218.8 1816.21,222.31 1823.54,222.31 1827.06,218.8 1827.06,162.44 1830.57,158.92 1836.54,158.92 1840.05,162.44 1840.05,220.95 1843.57,224.47 1851.13,224.47 1854.65,220.95 1854.65,162.64 1858.16,159.13 1887.84,159.13 1891.36,162.64 1891.36,204.82 1887.84,208.34 1873.57,208.34 v1(1872.43,209.48)
  Bottom Layer w6: U3.5@1870.16,238.26 1870.51,238.26 1872.43,236.34 v1(1872.43,209.48)
QSPI_D1: U3.2 U6.C3 | length 675.3
  Top Layer w4: v1@1547.1,256.85 1566.69,276.44 1601.24,276.44 1603.69,278.89 1621.96,278.92 ; 1623.91,278.95 1635.48,267.38 U6.C3@1636.7,267.38
  Bottom Layer w4: v1@1547.76,257.8 1576.82,286.85 1719.67,286.85 1740.23,307.41 1765.49,307.41 1780.16,322.08
  Bottom Layer w6: 1780.16,322.08 1857.6,399.52 1903.62,399.52 1951.31,351.83 1951.31,297.59 U3.2@1969.89,279.01 ; U3.2@1969.89,279.55 1978.26,279.55 U3.2@1980.29,277.52
  other v1: 1547.61,257.8
QSPI_D2: R44.1 U3.3 U6.C4 | length 629.4
  Top Layer w4: v1(1570.39,249.63) v1@1571.65,250.88 ; v1@1571.15,251.38 1587.15,267.38 U6.C4@1617.02,267.38
  Top Layer w6: v1(1745,285.64) 1746.82,287.45 1842.03,287.45 1862.47,267.01 1862.47,234.97 1865.98,231.45 1874.32,231.45 1877.84,234.97 1877.84,245.32 1881.35,248.83 1889.07,248.83 1892.59,245.32 1892.59,227.5 1901.72,218.37 1928.8,218.37 1944.71,234.28 1944.71,235.57 1949.17,240.03 v1(1949.17,243.28)
  Bottom Layer w4: v1(1570.39,249.63) 1573.07,252.31 1573.07,258.16 1592.76,277.85 1736.52,277.85 1744.3,285.64 v1(1745,285.64)
  Bottom Layer w6: v1(1949.17,243.28) 1949.17,244.16 1962.95,257.95 2026.66,257.95 R44.1@2028.01,256.59
QSPI_D3: R49.1 U3.7 U6.B3 U6.B4 | length 668.4
  Top Layer w4: v1@1594.81,248.08 1595.02,247.87 U6.B3@1636.77,247.87
  Bottom Layer w4: v1@1595.02,247.87 1636.14,247.87 1652.49,264.21 1657.13,268.85 1723.72,268.85 1728.36,264.21 1729.2,263.38 ; 1729.39,263.18 1729.39,246.73 1735.43,240.69
  Bottom Layer w6: v1@1594.81,248.08 v1@1595.02,247.87 ; 1735.43,240.69 1741.51,240.69 1745.02,244.2 1745.02,264.12 1748.54,267.64 1757.05,267.64 1760.56,264.12 1760.56,224.11 1764.08,220.6 1771.14,220.6 1774.65,224.11 1774.65,252.98 1774.65,300.32 1778.17,303.84 1787.89,303.84 1791.4,300.32 1791.4,252.98 1791.4,223.88 1794.92,220.36 1803.58,220.36 1807.09,223.88 1807.09,302.07 1810.61,305.58 1822.47,305.58 1827.72,300.33 1827.72,282.09 1832.1,277.7 U3.7@1863.84,277.7
  other v1: 1596,249.05
QSPI_SCLK: U3.6 U6.D2 | length 671.3
  Top Layer w4: U6.D2@1656.39,286.97 1716.72,286.97 1725.81,277.88 ; 1725.83,277.89 1733.69,270.02 1733.69,209.73 1736.4,207.02 ; 1736.4,206.83 1742.42,206.83 1744.76,209.18 1744.76,252.98
  Top Layer w6: 1744.76,252.98 1744.76,264.12 1748.28,267.64 1753.68,267.64 1757.2,264.12 1757.2,252.98 1757.2,204.49 1760.71,200.97 1768.68,200.97 1772.19,204.49 1772.19,272.94 1775.71,276.45 1783.16,276.45 1786.67,272.94 1786.67,204.4 1790.19,200.88 1796.62,200.88 1800.13,204.4 1800.13,272.94 1803.65,276.45 1817.24,276.45 1820.75,272.94 1820.75,252.98 1820.75,238.47 1824.27,234.96 1833.39,234.96 1840.9,242.47 v1(1842.15,242.47)
  Bottom Layer w6: v1(1842.15,242.47) 1842.96,243.27 1842.96,252.98 1842.96,255.43 1846.47,258.95 1869.16,258.95 U3.6@1870.16,257.95
RADAR_1P2_RF: C20.2 C44.1 TP14.1 U6.L7 U6.L8 U6.L9 U6.L10 | length 136.6
  Top Layer w13: U6.L10@1272.59,425.03 v1@1349.01,425.03 ; v1@1352.18,422.84 1352.18,420.73 v1(1361.62,411.29)
  Bottom Layer w13: v1@1351.69,423.41 1355,420.11 C44.1@1381.93,420.11 C44.1@1391.18,429.35
  other v1: 1352.01,421.92
RADAR_1V2: C27.2 TP13.1 U6.K2 | length 61.4
  Top Layer w10: v1@1695.03,410.68 v1@1699.21,414.3 ; v1@1711.76,417.82 v1@1713.36,417.71
  Top Layer w11: U6.K2@1656.39,405.18 1660.14,408.93 v1@1695.03,408.93
  Top Layer w12: v1@1699.21,414.3 1703.92,418.38 v1@1711.76,417.82
  other v1: 1707.5,408.26 1687.42,410.15 1700.69,419.14 1714.1,419.42
RADAR_1V4_APLL: C22.1 U6.G8 | length 68.7
  Top Layer w10: U6.G8@1311.96,346.29 1312.95,346.29 1313.82,345.41 1354.37,345.41 v1@1355.66,344.12
  Bottom Layer w10: 1352.73,327.66 1353.68,327.66 ; v1@1352.9,341.26 1353.68,340.48 1353.68,327.66 ; C22.1@1362.73,328.1 1362.29,327.66 1353.68,327.66
  other v1: 1353.34,342.7
RADAR_1V4_SYNTH: C18.1 U6.F7 | length 57.1
  Top Layer w10: U6.F7@1331.58,326.44 1337.33,326.44 1364.15,299.62 v1(1364.15,298.19)
  Bottom Layer w10: C18.1@1352.66,298.99 1352.75,298.9 v1@1364.57,298.9
RADAR_1V8: C13.1 C14.2 C15.1 R6.2 R11.1 TP12.1 U6.B1 U6.D7 U6.F9 U6.F10 U6.H7 U6.H8 U6.L1 U6.L2 U6.M7 U6.M8 U6.M9 U6.N6 U6.N7 U6.N8 U6.N9 U6.N10 | length 1823.5
  Top Layer w9: U6.L2@1656.39,424.86 U6.L1@1676.07,424.86 1679.96,428.75 1685.07,428.75 ; 1684.45,429.38 1695.97,440.9
  Top Layer w10: U6.F10@1272.59,326.61 U6.F9@1292.28,326.61 ; U6.N10@1272.59,464.4 1292.28,464.4 1292.28,463.87 v1@1301.99,454.42 ; U6.M9@1292.28,444.72 v1@1301.99,454.42 ; U6.M8@1311.96,444.72 1302.16,454.25 v1@1301.99,454.42 ; U6.M7@1331.65,444.72 1331.77,444.72 v1@1337.22,450.16 ; v1@1341.11,454.55 1331.65,464.01 1331.65,464.4 1311.96,464.4 v1@1301.99,454.42 ; v1@1341.3,454.72 1350.98,464.4 U6.N6@1351.33,464.4 ; v1@1343.15,451.76 1345.69,449.23 1357.72,449.23 ; v1@1548.17,232.25 1548.17,216.24 1565.96,198.45 1578.6,198.45 1579.1,198.95 1695.06,198.95 1703.09,206.98 1703.09,227.46 1687.62,242.93 1680.8,242.93 U6.B1@1676.07,247.7 ; 1695.97,440.9 1697.23,440.9 1699.02,439.11 1720.95,439.11 1727.12,445.28 v1(1729.28,445.28)
  Top Layer w15: U6.H8@1311.96,365.98 U6.H7@1331.65,365.98 ; U6.D7@1331.58,287.07 1332.6,286.05 1342.25,286.05 1356.09,272.21 1388.59,272.21
  Top Layer w18: U6.F10@1272.59,326.61 1242.56,326.61 1213.92,355.24 1213.92,449.95 1228.38,464.4 U6.N10@1272.59,464.4 ; 1357.72,451.2 1388.86,420.06 1388.86,272.21 ; 1388.59,272.21 1388.86,272.21 ; v1(1416.58,259.3) 1416.58,261.66 1406.03,272.21 1388.86,272.21
  Bottom Layer w10: v1@1417.24,258.64 1441.71,258.64 1458.42,241.93 1533.46,241.93 v1@1542.91,232.48 ; R11.1@1823.19,514.01 R11.1@1823.52,513.68
  Bottom Layer w18: v1(1259.21,326.98) 1277.77,326.98 1316.2,365.41 v1(1322.11,365.41) ; 1347.51,473.91 1347.51,494.04 1351.98,498.52 1351.98,499.22 1386.3,533.53 1712.3,533.53 1733.92,511.92 1736.38,511.92 1738.54,509.76 TP12.1@1738.54,508.64 ; v1(1729.28,445.28) 1747.46,463.45 C15.1@1747.62,463.45 ; C15.1@1741.4,463.45 TP12.1@1741.4,504.43 ; TP12.1@1743.67,508.42 1748.77,513.51 1751.7,513.51 1752.32,514.14 1767.17,514.14 R6.2@1770.96,517.93 ; C15.1@1747.62,459.12 C15.1@1748.31,459.12 ; R6.2@1770.96,515.84 R11.1@1814.59,515.84
  other v1: 1547.98,232.45 1302.03,454.12 1321.88,454.12 1341.83,453.98
RADAR_1V_RF_OUT: C9.2 C23.1 U6.C7 U6.K7 U6.K8 U6.K9 U6.K10 | length 278.3
  Top Layer w12: U6.K10@1272.59,405.35 U6.K8@1311.96,405.35 ; U6.K8@1311.9,405.18 U6.K7@1331.58,405.18 ; U6.K7@1331.58,405.35 1336.01,405.35 v1@1351.08,390.28 ; U6.C7@1331.87,267.55 1334.59,267.55 1348.48,253.66 1348.59,253.66 1351.59,250.66 v1@1353.22,250.66 ; v1(1351.32,389.53) 1352.25,389.53 v1(1361.77,380.01)
  Bottom Layer w12: v1(1353.2,248.94) 1354.35,250.09 1354.35,258.52 1385.44,289.61 1385.44,340.45 1375.7,350.18 1375.7,360.12 1376.7,361.12 1376.7,368.14 C23.1@1386.45,377.89
RADAR_3V3: C17.2 C21.1 C34.2 C35.1 C39.1 L7.2 R4.1 R11.2 R12.1 R19.2 R24.1 R44.2 R49.2 R50.1 R73.1 R74.1 R75.1 R165.2 R175.1 TP9.1 U3.8 U4.3 U6.C1 U6.J1 | length 3633.9
  Top Layer w8: U6.J1@1676.07,385.49 1676.57,385.49 1679.58,382.48 1733.49,382.48 v1@1739.6,388.59
  Top Layer w10: R12.1@409.31,351.84 R12.1@409.31,351.84 459.07,351.89 v1(459.13,351.94) ; v1(742.46,150.29) 791.94,100.81 865.55,100.81 890.6,75.76 979.93,75.76 v1(1014.57,110.4) 1016.1,108.86 1016.1,101.48 1030.12,87.47 1080.29,87.47 v1(1093.45,100.63) ; U6.C1@1676.07,267.38 1680.76,262.7 1696.14,262.7 v1@1707.41,251.43 ; v1@1741.01,392.46 1749.18,400.62 1850.98,400.62 v1@1870.67,380.93 ; v1@1870.55,382.01 1930.67,442.13 v1(1930.67,457.21) ; v1(1878.25,82.07) 1895.4,64.92 1974.36,64.92 2000.62,91.18 2000.62,186.8 v1@1991.2,196.23
  Bottom Layer w8: v1(1741.76,391.71) 1746.49,391.71 1757.15,402.37 1756.28,403.24 C21.1@1756.28,411.93
  Bottom Layer w10: v1(459.13,351.94) 460.21,350.86 470.63,350.86 481.84,339.65 U4.3@481.84,218.03 ; C39.1@480.24,168.78 U4.3@480.24,217.16 ; C39.1@484.01,168.78 491.96,176.73 687.02,176.73 701.96,161.78 ; 701.67,161.49 712.6,150.56 762.52,150.56 R19.2@764.63,148.44 ; L7.2@995.83,84.96 995.83,85.94 v1@1013.04,103.16 ; R175.1@1094.16,45.81 1094.16,80.16 R165.2@1093.95,80.38 1093.45,80.87 v1(1093.45,100.63) 1104.21,111.39 1112.43,111.39 1124.51,123.46 1158.01,123.46 1188.02,153.48 1750.16,153.48 1784.78,118.87 1842.46,118.87 v1@1878.76,82.58 ; C17.2@1713.06,244.31 1750.43,206.94 1833.3,206.94 1852.1,188.14 1885.92,188.14 1894.79,197 ; R24.1@1825.07,565.99 R24.1@1830.06,565.99 ; R49.2@1829.52,331.59 1831.26,329.84 C34.2@1867.84,329.84 ; R24.1@1831.25,563.03 R11.2@1880.61,513.68 ; R73.1@1850.85,57.9 v1@1875.02,82.07 ; U3.8@1870.16,297.32 U3.8@1870.4,297.56 ; C35.1@1870.4,357.2 U3.8@1870.4,297.56 ; C35.1@1870.43,359.96 v1@1870.43,383.8 ; v1@1878.9,82.07 1878.9,65.48 1879.19,65.48 TP9.1@1896.17,48.49 ; R11.2@1883.07,508.21 1888.4,502.88 1897.25,502.88 1930.24,469.9 v1@1930.24,457.21 ; 1893.03,197 1893.03,290.48 1885.74,297.77 1870.62,297.77 U3.8@1870.4,297.56 ; 1893.61,195.82 2014.49,195.82 2017.26,198.6 2021.2,198.6 2028.01,205.41 2028.01,211.63 2034.82,218.44 2047.69,218.44 2062.8,233.56 2062.8,346.12 ; TP9.1@1896.31,48.63 1913.03,31.91 R74.1@1913.03,10.2 ; v1@1930.24,456.56 1966.31,456.56 R4.1@1972.36,450.51 ; R50.1@2028.62,346.12 2062.8,346.12 ; R75.1@2092.97,347.8 2091.29,346.12 2062.8,346.12
  other v1: 1991.05,196.83 1707.65,251.49 1870.55,381.2
RADAR_NRST: C48.2 J1.3 J3.1 R165.1 R176.1 U6.M3 U6.M4 | length 2673.6
  Top Layer w4: v1@743.57,22.4 737.66,16.49 737.66,-8.64 755.3,-26.28 841.33,-26.28 846.09,-21.52 846.09,-21.27 851.36,-16 851.61,-16 855.02,-12.59 1009.82,-12.59 ; v1(1131.7,100.75) 1132.21,101.26 v1(1132.21,144.28) 1178.49,144.28 1201.96,167.74 1433.9,167.74 1488.01,221.85 1488.01,233.53 1484.94,236.59 1457.24,236.59 1443.07,250.76 ; v1(1437.17,305.95) 1437.17,302.16 1441.65,297.68 1441.65,297.21 1442.89,295.97 1442.89,251.95
  Top Layer w6: 1009.82,-12.83 1053.22,-12.83 1070.75,-30.37 1079.74,-30.37 J3.1@1099.04,-49.67 ; v2@1100,-100 J3.1@1100,-43.75 ; v1(1522.66,422.94) 1525.65,422.94 1532.23,416.36 1594.5,416.36 1603.29,425.16 1603.29,430.82 U6.M4@1617.02,444.55 U6.M3@1636.7,444.55 1636.85,444.55 U6.M3@1637.24,444.15
  Bottom Layer w4: J1.3@118.1,562.73 133.15,562.73 160.89,590.47 210.57,590.47 219.71,581.32 219.71,562.21 204.52,547.02 181.98,547.02 167.28,532.31 ; 167.37,532.31 167.37,397.72 331.53,233.55 331.53,168.61 335.82,164.33 386.92,164.33 506.65,44.59 672.58,44.59 ; 672.58,44.48 713.62,44.48 v1(737.37,20.73) ; R176.1@1091.77,6.3 1091.77,14.74 1117.98,40.95 R165.1@1117.98,80.38 ; C48.2@1105.76,144.09 1131.04,144.09 v1@1132.38,145.43 ; R165.1@1117.57,80.38 1117.57,86.7 v1@1131.62,100.75
  Bottom Layer w6: R176.1@1091.77,6.3 1090.91,5.44 1090.91,-39.14 J3.1@1093.24,-41.47 ; v2@1100,-100 J3.1@1100,-43.75 ; v1@1438.04,305.95 1438.04,317.42 1465.31,344.7 1465.31,388.23 1488.98,411.9 1510.13,411.9 v1@1523.15,424.91
  other v2: 1092.59,-100
RADAR_OSC_CLKOUT: TP7.1 U6.A8 U6.B8 | length 102.2
  Top Layer w4: U6.B8@1311.96,247.87 1311.96,228.18 1324.25,215.9 1359.06,215.9 v1@1371.52,228.36
  Bottom Layer w4: v1@1371.57,231.69 1377.05,226.21 TP7.1@1381.98,226.21
  other v1: 1371.52,228.46
RADAR_SRAM_1V2: C5.2 C26.1 U6.M1 U6.M2 U6.N2 | length 39.4
  Top Layer w10: U6.N2@1656.45,464.4 1656.45,444.72 U6.M1@1676.14,444.72
  other v1: 1656.64,453.93
RADAR_VBGAP: C6.1 U6.H10 | length 42.9
  Top Layer w10: v1@1250.22,373.16 1257.4,365.98 U6.H10@1272.59,365.98
  Bottom Layer w10: v1@1253.96,374.75 C6.1@1266.34,362.37
  other v1: 1254.47,372.88
REG_1V8: C11.1 L6.2 R6.1 TP2.1 | length 788.6
  Top Layer w18: v1(1204.07,528.67) 1717.64,528.67 1769.64,580.67 1771.69,580.67
  Top Layer w20: v1(1182.67,557.4) 1182.67,550.77 v1@1204.07,529.37 ; 1770.86,579.84 1771.69,580.67 v1(1771.69,620.86)
  Bottom Layer w15: L6.2@1160.66,580.52 1182.85,558.33 C11.1@1182.85,514.41 ; R6.1@1770.96,575.02 R6.1@1772.17,576.22
  Bottom Layer w20: R6.1@1772.17,576.22 v1@1772.17,620.39
  other v1: 1771.4,599.84
REG_3V3: C4.1 C10.1 C56.1 C60.1 C69.1 C72.1 C73.1 C74.1 L4.2 L7.1 R3.2 R8.1 R172.1 U20.1 | length 513.8
  Top Layer w6: v1(953.83,611.07) 953.83,448.81 1023.01,379.63 1023.01,276.62 v1@989.96,243.57
  Bottom Layer w10: v1(953.83,611.07) 953.83,622.14 965.67,633.98 R172.1@965.67,641.96
  Bottom Layer w20: L4.2@894.26,318.99 894.26,295.45 R8.1@925.79,263.91
  other v1: 990.53,243.57
REG_MODE_SELECT: J26.1 R7.2 R26.1 R244.1 TP4.1 U2.3 U20.3 | length 1143.8
  Top Layer w6: v1(872.05,180.3) 873.14,181.39 873.14,230.21 882.96,240.03 957.29,240.03 1008.33,291.07 1008.33,365.28 v1@970.03,403.59
  Bottom Layer w6: U2.3@652.95,322.04 652.95,303.46 662.5,293.91 662.5,269.06 684.18,247.38 684.18,213.58 692.08,205.67 710.28,205.67 726.09,189.86 760.11,189.86 787.91,162.06 787.91,67.68 802.73,52.86 851.27,52.86 856.91,58.5 ; TP4.1@860.31,-2.84 864.62,-7.14 R244.1@892.27,-7.14 ; v1(872.05,180.3) 863.28,171.53 859.8,171.53 856.28,168.02 856.28,59.12 871.93,43.48 871.93,29.96 890.56,11.33 J26.1@890.56,-37.54 ; J26.1@895.05,-37.54 895.05,-38.8 J26.1@900,-43.75 ; v1@966.99,401.69 968.88,403.59 R7.2@1003.84,403.59 ; R7.2@1004.11,403.31 1015.99,403.31 1027.79,391.52 1027.79,380.41 1035.37,372.83 U20.3@1051.03,372.83
  other v1: 970.03,403.9
  other v2: 892.59,-100
REG_OUT_1V8: C2.1 C128.1 C129.1 J24.1 L6.1 L15.2 R1.2 | length 345.8
  Bottom Layer w18: C2.1@1066.97,531.81 1105.54,570.38 L6.1@1105.54,580.52 1112.37,587.36 C129.1@1112.37,651.17 C129.1@1111.44,652.11 ; v2@1100,800 1100,743.75 1111.44,732.31 ; R1.2@1123.56,427.13 1170.35,427.13 L15.2@1175.21,422.27
  Bottom Layer w30: C129.1@1111.44,652.11 C128.1@1111.44,695.03 1111.44,732.31
  other v1: 1141.27,415.16 1140.91,434.41 1100.13,624.16 1118.02,623.86
  other v2: 1097.82,800
REG_PG_1V8: R175.2 R176.2 R179.2 U20.6 | length 558.1
  Bottom Layer w6: R179.2@1036.12,476.24 1036.12,473.87 1065.02,444.97 1065.02,409.02 1081.96,392.08 1081.96,383.86 1092.99,372.83 ; R175.2@1072.19,45.89 1072.19,66.92 1069.62,69.49 1069.62,176.51 1080.26,187.14 1080.26,230.02 1071.36,238.91 1051.98,238.91 1046.8,244.09 1046.8,288.42 1074.51,316.13 1074.51,355.74 1091.59,372.83 1092.99,372.83 ; R176.2@1073.21,8.53 R175.2@1073.21,45.81 ; U20.6@1109.3,372.83 1092.99,372.83
REG_PG_3V3: R23.2 R29.2 U2.6 | length 301.4
  Top Layer w6: R29.2@597.97,581.19 591.13,574.35 586.81,574.35 564.14,551.68 564.14,446.14 601.51,408.78 v1(622.31,408.78)
  Bottom Layer w6: R23.2@613.1,433.23 613.1,417.98 v1(622.31,408.78) 635.21,408.78 U2.6@651.53,392.46 ; U2.6@651.26,391.56 651.26,382 U2.6@652.95,380.3
RS232_RX: J1.9 J7.1 J27.1 R17.1 R74.2 U6.G2 | length 4390.4
  Top Layer w4: v2(163.65,800) J27.1@163.65,743.75 186.14,743.75 189.99,739.9 ; v1(755.38,-2.17) 768.64,-15.43 839.15,-15.43 851.74,-2.83 1057.36,-2.83 1070.52,-16 1119.36,-16 1142.48,7.13 v1(1142.48,23.57) ; U6.G2@1656.39,346.12 1656.47,346.04 1901.63,346.04 1921.42,326.25 1933.51,326.25 1972.8,365.55 1972.8,398.64 2001.12,426.95 2052.34,426.95 v1@2065.86,413.43 ; v1(1809.21,84.87) 1811.89,87.54 1811.89,94.16 1826.11,108.38 1850.08,108.38 1857.19,103.38 1858.61,101.96 1858.61,59.1 1875.42,42.28 1960.75,42.28 v1(1961.24,42.78) ; v1(2116.94,411.64) 2116.94,408.72 2123.36,402.3 2123.36,38.33
  Top Layer w6: v1@156.57,357.05 157.55,357.05 167.2,347.4 295.65,347.4 342.72,300.33 432.75,300.33 451.6,281.48 R17.1@492.91,281.48 ; 189.99,739.9 191.86,738.03 v1(191.86,571.83) ; v2@1932.7,-100 1932.7,-43.75 1932.7,-20.14 1940.5,-12.35 2072.68,-12.35 2123.36,38.33